# Altium PCB M238封装 AD版本.PcbDoc
Units mil, origin at the board's own origin, x right, y up, seen from the top; angles counter-clockwise.
Board outline 6000 x 4000 mil, 2 copper layers (Top Layer, Bottom Layer); 2 components, 0 nets, 758 pads, 0 vias.
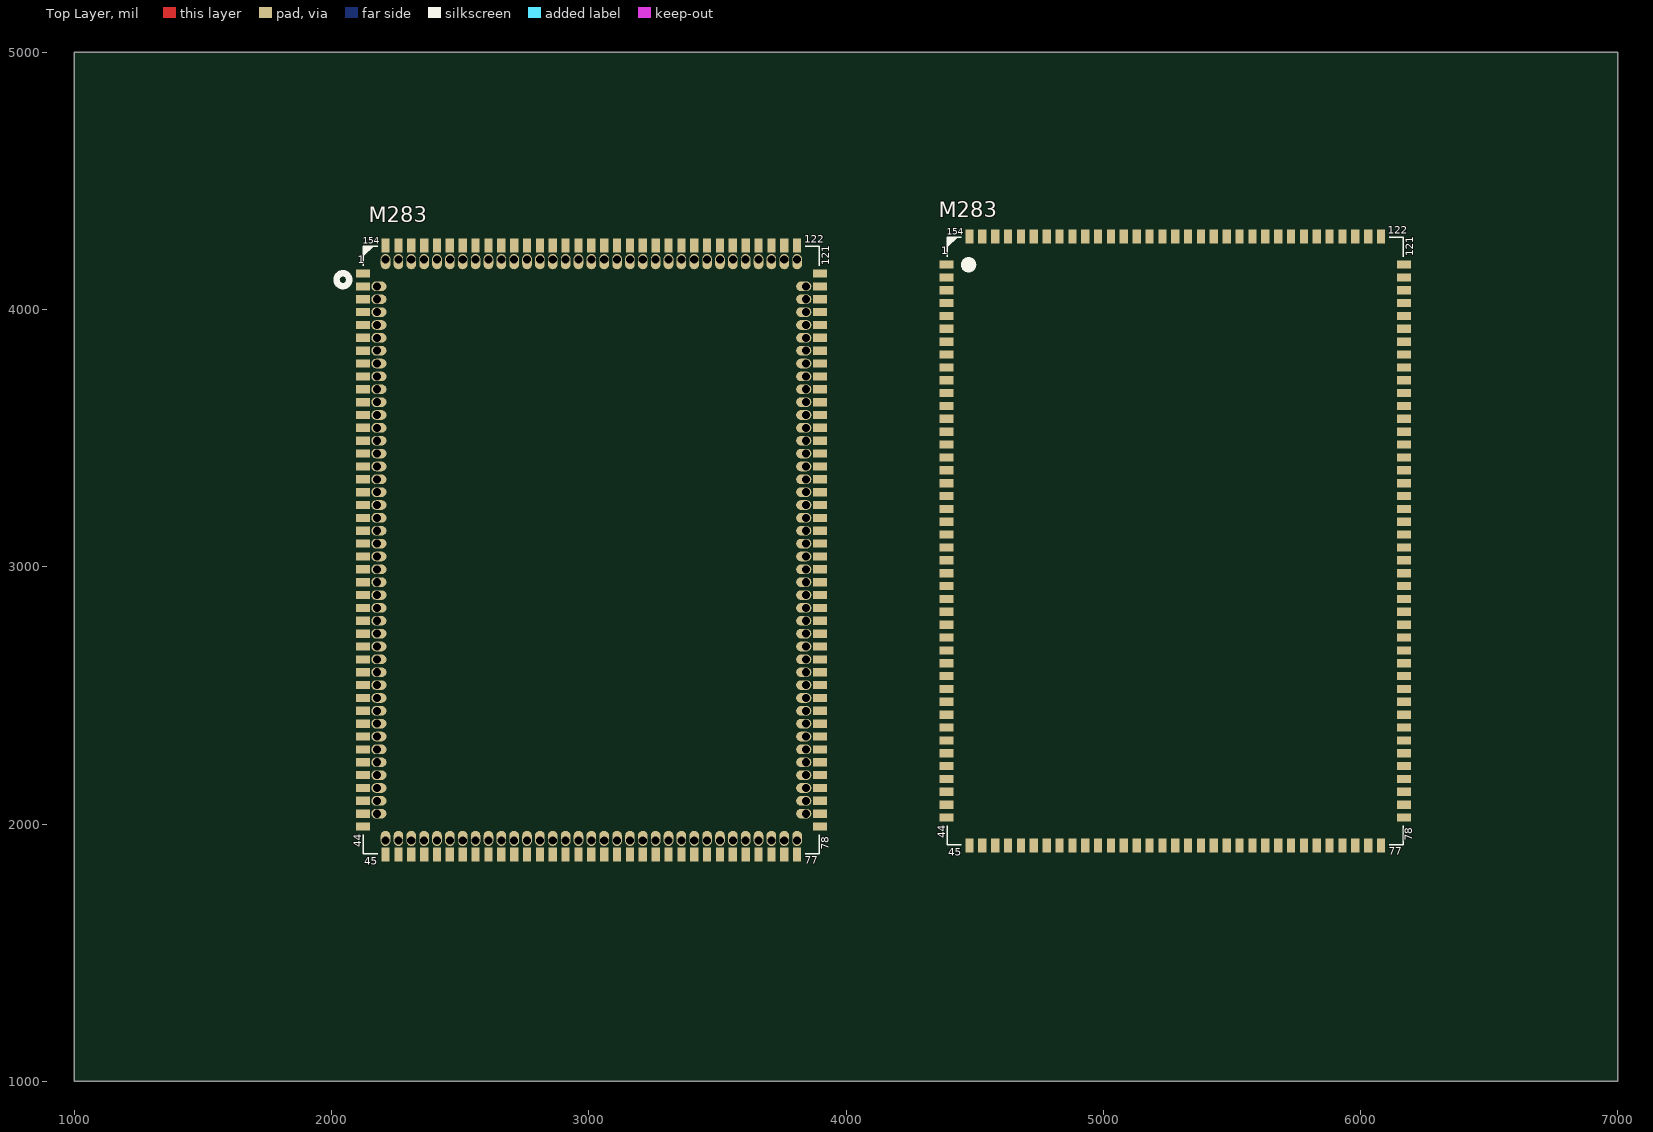
[diagram p0: Top Layer view]
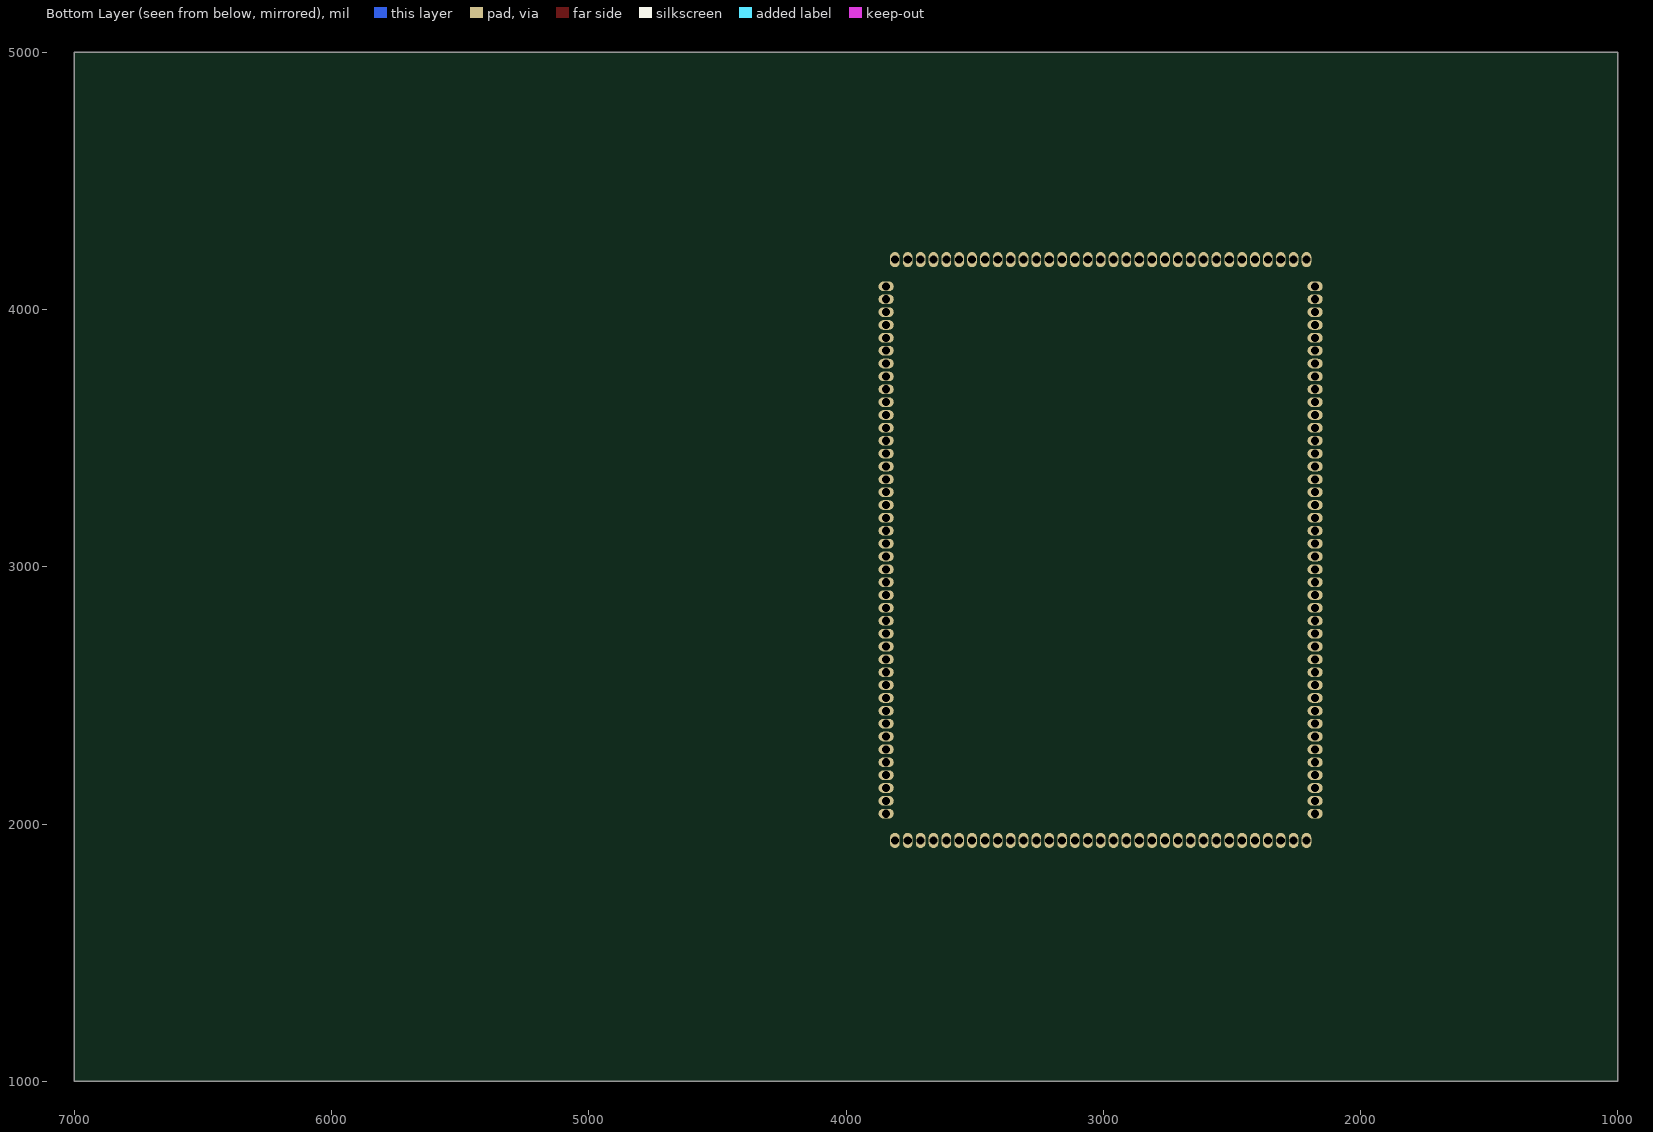
[diagram p1: Bottom Layer view, seen from below]

## Layer stack, top to bottom
Top Layer: signal copper 1.4
Dielectric: dielectric 12.6, FR-4, Dk 4.8
Bottom Layer: signal copper 1.4

## Board outline
1000,1000 7000,1000 7000,5000 1000,5000

## Design rules (kind name [scope] priority, off if disabled: settings)
Clearance [All] p1: gap=10
PolygonConnect [All] p1: connectstyle=Relief reliefconductorwidth=10 reliefentries=4 polygonreliefangle="90 Angle"
RoutingVias [All] p1: holewidth=28 width=50 viastyle="Through Hole" minholewidth=28 minwidth=50 maxholewidth=28 maxwidth=50
SilkscreenOverComponentPads [All] p1: minsilkscreentomaskgap=10
SolderMaskExpansion [All] p1: expansion=4
Width [All] p1: maxlimit=10 minlimit=10 preferedwidth=10
27 further rules are at their usual default settings.

## Components (designator, comment, footprint, x,y, rotation, side; value= is the part's Value field where it differs from the comment)
M283 "Comment" M283-154-NC 5280,3100 r0 top
M283 "Comment" M283-154 3010,3065 r0 top

## Footprints (in the part's own frame and the unit in brackets; to place one, negate y for a bottom-side part, rotate by r counter-clockwise, add the part's x,y. Pads: shape width x height; smd on the part's side, far side on the other; paste and mask are expansions set on the pad)
M283-154 [mm]
  rect 1.384x0.813 smd mask+0.051: 1(-22.57,27.305) 2(-22.57,26.035) 3(-22.57,24.765) 4(-22.57,23.495) 5(-22.57,22.225) 6(-22.57,20.955) 7(-22.57,19.685) 8(-22.57,18.415) 9(-22.57,17.145) 10(-22.57,15.875) 11(-22.57,14.605) 12(-22.57,13.335) 13(-22.57,12.065) 14(-22.57,10.795) 15(-22.57,9.525) 16(-22.57,8.255) 17(-22.57,6.985) 18(-22.57,5.715) 19(-22.57,4.445) 20(-22.57,3.175) 21(-22.57,1.905) 22(-22.57,0.635) 23(-22.57,-0.635) 24(-22.57,-1.905) 25(-22.57,-3.175) 26(-22.57,-4.445) 27(-22.57,-5.715) 28(-22.57,-6.985) 29(-22.57,-8.255) 30(-22.57,-9.525) 31(-22.57,-10.795) 32(-22.57,-12.065) 33(-22.57,-13.335) 34(-22.57,-14.605) 35(-22.57,-15.875) 36(-22.57,-17.145) 37(-22.57,-18.415) 38(-22.57,-19.685) 39(-22.57,-20.955) 40(-22.57,-22.225) 41(-22.57,-23.495) 42(-22.57,-24.765) 43(-22.57,-26.035) 44(-22.57,-27.305) 78(22.57,-27.305) 79(22.57,-26.035) 80(22.57,-24.765) 81(22.57,-23.495) 82(22.57,-22.225) 83(22.57,-20.955) 84(22.57,-19.685) 85(22.57,-18.415) 86(22.57,-17.145) 87(22.57,-15.875) 88(22.57,-14.605) 89(22.57,-13.335) 90(22.57,-12.065) 91(22.57,-10.795) 92(22.57,-9.525) 93(22.57,-8.255) 94(22.57,-6.985) 95(22.57,-5.715) 96(22.57,-4.445) 97(22.57,-3.175) 98(22.57,-1.905) 99(22.57,-0.635) 100(22.57,0.635) 101(22.57,1.905) 102(22.57,3.175) 103(22.57,4.445) 104(22.57,5.715) 105(22.57,6.985) 106(22.57,8.255) 107(22.57,9.525) 108(22.57,10.795) 109(22.57,12.065) 110(22.57,13.335) 111(22.57,14.605) 112(22.57,15.875) 113(22.57,17.145) 114(22.57,18.415) 115(22.57,19.685) 116(22.57,20.955) 117(22.57,22.225) 118(22.57,23.495) 119(22.57,24.765) 120(22.57,26.035) 121(22.57,27.305)
  oval 1x0.94 hole 0.8 mask+0.051: 2(-21.179,26.035) 3(-21.179,24.765) 4(-21.179,23.495) 5(-21.179,22.225) 6(-21.179,20.955) 7(-21.179,19.685) 8(-21.179,18.415) 9(-21.179,17.145) 10(-21.179,15.875) 11(-21.179,14.605) 12(-21.179,13.335) 13(-21.179,12.065) 14(-21.179,10.795) 15(-21.179,9.525) 16(-21.179,8.255) 17(-21.179,6.985) 18(-21.179,5.715) 19(-21.179,4.445) 20(-21.179,3.175) 21(-21.179,1.905) 22(-21.179,0.635) 23(-21.179,-0.635) 24(-21.179,-1.905) 25(-21.179,-3.175) 26(-21.179,-4.445) 27(-21.179,-5.715) 28(-21.179,-6.985) 29(-21.179,-8.255) 30(-21.179,-9.525) 31(-21.179,-10.795) 32(-21.179,-12.065) 33(-21.179,-13.335) 34(-21.179,-14.605) 35(-21.179,-15.875) 36(-21.179,-17.145) 37(-21.179,-18.415) 38(-21.179,-19.685) 39(-21.179,-20.955) 40(-21.179,-22.225) 41(-21.179,-23.495) 42(-21.179,-24.765) 43(-21.179,-26.035) 79(21.179,-26.035) 80(21.179,-24.765) 81(21.179,-23.495) 82(21.179,-22.225) 83(21.179,-20.955) 84(21.179,-19.685) 85(21.179,-18.415) 86(21.179,-17.145) 87(21.179,-15.875) 88(21.179,-14.605) 89(21.179,-13.335) 90(21.179,-12.065) 91(21.179,-10.795) 92(21.179,-9.525) 93(21.179,-8.255) 94(21.179,-6.985) 95(21.179,-5.715) 96(21.179,-4.445) 97(21.179,-3.175) 98(21.179,-1.905) 99(21.179,-0.635) 100(21.179,0.635) 101(21.179,1.905) 102(21.179,3.175) 103(21.179,4.445) 104(21.179,5.715) 105(21.179,6.985) 106(21.179,8.255) 107(21.179,9.525) 108(21.179,10.795) 109(21.179,12.065) 110(21.179,13.335) 111(21.179,14.605) 112(21.179,15.875) 113(21.179,17.145) 114(21.179,18.415) 115(21.179,19.685) 116(21.179,20.955) 117(21.179,22.225) 118(21.179,23.495) 119(21.179,24.765) 120(21.179,26.035)
  oval 1.5x0.95 smd far side paste-14 mask+0.051: 2(-21.179,26.035) 3(-21.179,24.765) 4(-21.179,23.495) 5(-21.179,22.225) 6(-21.179,20.955) 7(-21.179,19.685) 8(-21.179,18.415) 9(-21.179,17.145) 10(-21.179,15.875) 11(-21.179,14.605) 12(-21.179,13.335) 13(-21.179,12.065) 14(-21.179,10.795) 15(-21.179,9.525) 16(-21.179,8.255) 17(-21.179,6.985) 18(-21.179,5.715) 19(-21.179,4.445) 20(-21.179,3.175) 21(-21.179,1.905) 22(-21.179,0.635) 23(-21.179,-0.635) 24(-21.179,-1.905) 25(-21.179,-3.175) 26(-21.179,-4.445) 27(-21.179,-5.715) 28(-21.179,-6.985) 29(-21.179,-8.255) 30(-21.179,-9.525) 31(-21.179,-10.795) 32(-21.179,-12.065) 33(-21.179,-13.335) 34(-21.179,-14.605) 35(-21.179,-15.875) 36(-21.179,-17.145) 37(-21.179,-18.415) 38(-21.179,-19.685) 39(-21.179,-20.955) 40(-21.179,-22.225) 41(-21.179,-23.495) 42(-21.179,-24.765) 43(-21.179,-26.035) 79(21.179,-26.035) 80(21.179,-24.765) 81(21.179,-23.495) 82(21.179,-22.225) 83(21.179,-20.955) 84(21.179,-19.685) 85(21.179,-18.415) 86(21.179,-17.145) 87(21.179,-15.875) 88(21.179,-14.605) 89(21.179,-13.335) 90(21.179,-12.065) 91(21.179,-10.795) 92(21.179,-9.525) 93(21.179,-8.255) 94(21.179,-6.985) 95(21.179,-5.715) 96(21.179,-4.445) 97(21.179,-3.175) 98(21.179,-1.905) 99(21.179,-0.635) 100(21.179,0.635) 101(21.179,1.905) 102(21.179,3.175) 103(21.179,4.445) 104(21.179,5.715) 105(21.179,6.985) 106(21.179,8.255) 107(21.179,9.525) 108(21.179,10.795) 109(21.179,12.065) 110(21.179,13.335) 111(21.179,14.605) 112(21.179,15.875) 113(21.179,17.145) 114(21.179,18.415) 115(21.179,19.685) 116(21.179,20.955) 117(21.179,22.225) 118(21.179,23.495) 119(21.179,24.765) 120(21.179,26.035)
  oval 1.5x0.95 smd paste-14: 2(-20.976,26.035)
  oval 1.5x0.95 smd paste-14 mask+0.102: 3(-20.976,24.765) 4(-20.976,23.495) 5(-20.976,22.225) 6(-20.976,20.955) 7(-20.976,19.685) 8(-20.976,18.415) 9(-20.976,17.145) 10(-20.976,15.875) 11(-20.976,14.605) 12(-20.976,13.335) 13(-20.976,12.065) 14(-20.976,10.795) 15(-20.976,9.525) 16(-20.976,8.255) 17(-20.976,6.985) 18(-20.976,5.715) 19(-20.976,4.445) 20(-20.976,3.175) 21(-20.976,1.905) 22(-20.976,0.635) 23(-20.976,-0.635) 24(-20.976,-1.905) 25(-20.976,-3.175) 26(-20.976,-4.445) 27(-20.976,-5.715) 28(-20.976,-6.985) 29(-20.976,-8.255) 30(-20.976,-9.525) 31(-20.976,-10.795) 32(-20.976,-12.065) 33(-20.976,-13.335) 34(-20.976,-14.605) 35(-20.976,-15.875) 36(-20.976,-17.145) 37(-20.976,-18.415) 38(-20.976,-19.685) 39(-20.976,-20.955) 40(-20.976,-22.225) 41(-20.976,-23.495) 42(-20.976,-24.765) 43(-20.976,-26.035) 79(20.976,-26.035) 80(20.976,-24.765) 81(20.976,-23.495) 82(20.976,-22.225) 83(20.976,-20.955) 84(20.976,-19.685) 85(20.976,-18.415) 86(20.976,-17.145) 87(20.976,-15.875) 88(20.976,-14.605) 89(20.976,-13.335) 90(20.976,-12.065) 91(20.976,-10.795) 92(20.976,-9.525) 93(20.976,-8.255) 94(20.976,-6.985) 95(20.976,-5.715) 96(20.976,-4.445) 97(20.976,-3.175) 98(20.976,-1.905) 99(20.976,-0.635) 100(20.976,0.635) 101(20.976,1.905) 102(20.976,3.175) 103(20.976,4.445) 104(20.976,5.715) 105(20.976,6.985) 106(20.976,8.255) 107(20.976,9.525) 108(20.976,10.795) 109(20.976,12.065) 110(20.976,13.335) 111(20.976,14.605) 112(20.976,15.875) 113(20.976,17.145) 114(20.976,18.415) 115(20.976,19.685) 116(20.976,20.955) 117(20.976,22.225) 118(20.976,23.495) 119(20.976,24.765) 120(20.976,26.035)
  rect 0.813x1.384 smd mask+0.051: 45(-20.32,-30.07) 46(-19.05,-30.07) 47(-17.78,-30.07) 48(-16.51,-30.07) 49(-15.24,-30.07) 50(-13.97,-30.07) 51(-12.7,-30.07) 52(-11.43,-30.07) 53(-10.16,-30.07) 54(-8.89,-30.07) 55(-7.62,-30.07) 56(-6.35,-30.07) 57(-5.08,-30.07) 58(-3.81,-30.07) 59(-2.54,-30.07) 60(-1.27,-30.07) 61(0,-30.07) 62(1.27,-30.07) 63(2.54,-30.07) 64(3.81,-30.07) 65(5.08,-30.07) 66(6.35,-30.07) 67(7.62,-30.07) 68(8.89,-30.07) 69(10.16,-30.07) 70(11.43,-30.07) 71(12.7,-30.07) 72(13.97,-30.07) 73(15.24,-30.07) 74(16.51,-30.07) 75(17.78,-30.07) 76(19.05,-30.07) 77(20.32,-30.07) 122(20.32,30.07) 123(19.05,30.07) 124(17.78,30.07) 125(16.51,30.07) 126(15.24,30.07) 127(13.97,30.07) 128(12.7,30.07) 129(11.43,30.07) 130(10.16,30.07) 131(8.89,30.07) 132(7.62,30.07) 133(6.35,30.07) 134(5.08,30.07) 135(3.81,30.07) 136(2.54,30.07) 137(1.27,30.07) 138(0,30.07) 139(-1.27,30.07) 140(-2.54,30.07) 141(-3.81,30.07) 142(-5.08,30.07) 143(-6.35,30.07) 144(-7.62,30.07) 145(-8.89,30.07) 146(-10.16,30.07) 147(-11.43,30.07) 148(-12.7,30.07) 149(-13.97,30.07) 150(-15.24,30.07) 151(-16.51,30.07) 152(-17.78,30.07) 153(-19.05,30.07) 154(-20.32,30.07)
  oval 0.95x1 hole 0.8 mask+0.051: 45(-20.32,-28.679)
  oval 0.95x1.5 smd far side paste-14 mask+0.051: 45(-20.32,-28.679) 46(-19.05,-28.679) 47(-17.78,-28.679) 48(-16.51,-28.679) 49(-15.24,-28.679) 50(-13.97,-28.679) 51(-12.7,-28.679) 52(-11.43,-28.679) 53(-10.16,-28.679) 54(-8.89,-28.679) 55(-7.62,-28.679) 56(-6.35,-28.679) 57(-5.08,-28.679) 58(-3.81,-28.679) 59(-2.54,-28.679) 60(-1.27,-28.679) 61(0,-28.679) 62(1.27,-28.679) 63(2.54,-28.679) 64(3.81,-28.679) 65(5.08,-28.679) 66(6.35,-28.679) 67(7.62,-28.679) 68(8.89,-28.679) 69(10.16,-28.679) 70(11.43,-28.679) 71(12.7,-28.679) 72(13.97,-28.679) 73(15.24,-28.679) 74(16.51,-28.679) 75(17.78,-28.679) 76(19.05,-28.679) 77(20.32,-28.679) 122(20.32,28.679) 123(19.05,28.679) 124(17.78,28.679) 125(16.51,28.679) 126(15.24,28.679) 127(13.97,28.679) 128(12.7,28.679) 129(11.43,28.679) 130(10.16,28.679) 131(8.89,28.679) 132(7.62,28.679) 133(6.35,28.679) 134(5.08,28.679) 135(3.81,28.679) 136(2.54,28.679) 137(1.27,28.679) 138(0,28.679) 139(-1.27,28.679) 140(-2.54,28.679) 141(-3.81,28.679) 142(-5.08,28.679) 143(-6.35,28.679) 144(-7.62,28.679) 145(-8.89,28.679) 146(-10.16,28.679) 147(-11.43,28.679) 148(-12.7,28.679) 149(-13.97,28.679) 150(-15.24,28.679) 151(-16.51,28.679) 152(-17.78,28.679) 153(-19.05,28.679) 154(-20.32,28.679)
  oval 0.95x1.5 smd paste-14 mask+0.102: 45(-20.32,-28.476) 46(-19.05,-28.476) 47(-17.78,-28.476) 48(-16.51,-28.476) 49(-15.24,-28.476) 50(-13.97,-28.476) 51(-12.7,-28.476) 52(-11.43,-28.476) 53(-10.16,-28.476) 54(-8.89,-28.476) 55(-7.62,-28.476) 56(-6.35,-28.476) 57(-5.08,-28.476) 58(-3.81,-28.476) 59(-2.54,-28.476) 60(-1.27,-28.476) 61(0,-28.476) 62(1.27,-28.476) 63(2.54,-28.476) 64(3.81,-28.476) 65(5.08,-28.476) 66(6.35,-28.476) 67(7.62,-28.476) 68(8.89,-28.476) 69(10.16,-28.476) 70(11.43,-28.476) 71(12.7,-28.476) 72(13.97,-28.476) 73(15.24,-28.476) 74(16.51,-28.476) 75(17.78,-28.476) 76(19.05,-28.476) 77(20.32,-28.476) 122(20.32,28.476) 123(19.05,28.476) 124(17.78,28.476) 125(16.51,28.476) 126(15.24,28.476) 127(13.97,28.476) 128(12.7,28.476) 129(11.43,28.476) 130(10.16,28.476) 131(8.89,28.476) 132(7.62,28.476) 133(6.35,28.476) 134(5.08,28.476) 135(3.81,28.476) 136(2.54,28.476) 137(1.27,28.476) 138(0,28.476) 139(-1.27,28.476) 140(-2.54,28.476) 141(-3.81,28.476) 142(-5.08,28.476) 143(-6.35,28.476) 144(-7.62,28.476) 145(-8.89,28.476) 146(-10.16,28.476) 147(-11.43,28.476) 148(-12.7,28.476) 149(-13.97,28.476) 150(-15.24,28.476) 151(-16.51,28.476) 152(-17.78,28.476) 153(-19.05,28.476) 154(-20.32,28.476)
  oval 0.94x1 hole 0.8 mask+0.051: 46(-19.05,-28.679) 47(-17.78,-28.679) 48(-16.51,-28.679) 49(-15.24,-28.679) 50(-13.97,-28.679) 51(-12.7,-28.679) 52(-11.43,-28.679) 53(-10.16,-28.679) 54(-8.89,-28.679) 55(-7.62,-28.679) 56(-6.35,-28.679) 57(-5.08,-28.679) 58(-3.81,-28.679) 59(-2.54,-28.679) 60(-1.27,-28.679) 61(0,-28.679) 62(1.27,-28.679) 63(2.54,-28.679) 64(3.81,-28.679) 65(5.08,-28.679) 66(6.35,-28.679) 67(7.62,-28.679) 68(8.89,-28.679) 69(10.16,-28.679) 70(11.43,-28.679) 71(12.7,-28.679) 72(13.97,-28.679) 73(15.24,-28.679) 74(16.51,-28.679) 75(17.78,-28.679) 76(19.05,-28.679) 77(20.32,-28.679) 122(20.32,28.679) 123(19.05,28.679) 124(17.78,28.679) 125(16.51,28.679) 126(15.24,28.679) 127(13.97,28.679) 128(12.7,28.679) 129(11.43,28.679) 130(10.16,28.679) 131(8.89,28.679) 132(7.62,28.679) 133(6.35,28.679) 134(5.08,28.679) 135(3.81,28.679) 136(2.54,28.679) 137(1.27,28.679) 138(0,28.679) 139(-1.27,28.679) 140(-2.54,28.679) 141(-3.81,28.679) 142(-5.08,28.679) 143(-6.35,28.679) 144(-7.62,28.679) 145(-8.89,28.679) 146(-10.16,28.679) 147(-11.43,28.679) 148(-12.7,28.679) 149(-13.97,28.679) 150(-15.24,28.679) 151(-16.51,28.679) 152(-17.78,28.679) 153(-19.05,28.679) 154(-20.32,28.679)
  silkscreen extent -25.16,-30 22.5,30
M283-154-NC [mil]
  rect 54.5x32 smd mask+2: 1(-888.58,1075) 2(-888.58,1025) 3(-888.58,975) 4(-888.58,925) 5(-888.58,875) 6(-888.58,825) 7(-888.58,775) 8(-888.58,725) 9(-888.58,675) 10(-888.58,625) 11(-888.58,575) 12(-888.58,525) 13(-888.58,475) 14(-888.58,425) 15(-888.58,375) 16(-888.58,325) 17(-888.58,275) 18(-888.58,225) 19(-888.58,175) 20(-888.58,125) 21(-888.58,75) 22(-888.58,25) 23(-888.58,-25) 24(-888.58,-75) 25(-888.58,-125) 26(-888.58,-175) 27(-888.58,-225) 28(-888.58,-275) 29(-888.58,-325) 30(-888.58,-375) 31(-888.58,-425) 32(-888.58,-475) 33(-888.58,-525) 34(-888.58,-575) 35(-888.58,-625) 36(-888.58,-675) 37(-888.58,-725) 38(-888.58,-775) 39(-888.58,-825) 40(-888.58,-875) 41(-888.58,-925) 42(-888.58,-975) 43(-888.58,-1025) 44(-888.58,-1075) 78(888.58,-1075) 79(888.58,-1025) 80(888.58,-975) 81(888.58,-925) 82(888.58,-875) 83(888.58,-825) 84(888.58,-775) 85(888.58,-725) 86(888.58,-675) 87(888.58,-625) 88(888.58,-575) 89(888.58,-525) 90(888.58,-475) 91(888.58,-425) 92(888.58,-375) 93(888.58,-325) 94(888.58,-275) 95(888.58,-225) 96(888.58,-175) 97(888.58,-125) 98(888.58,-75) 99(888.58,-25) 100(888.58,25) 101(888.58,75) 102(888.58,125) 103(888.58,175) 104(888.58,225) 105(888.58,275) 106(888.58,325) 107(888.58,375) 108(888.58,425) 109(888.58,475) 110(888.58,525) 111(888.58,575) 112(888.58,625) 113(888.58,675) 114(888.58,725) 115(888.58,775) 116(888.58,825) 117(888.58,875) 118(888.58,925) 119(888.58,975) 120(888.58,1025) 121(888.58,1075)
  rect 32x54.5 smd mask+2: 45(-800,-1183.85) 46(-750,-1183.85) 47(-700,-1183.85) 48(-650,-1183.85) 49(-600,-1183.85) 50(-550,-1183.85) 51(-500,-1183.85) 52(-450,-1183.85) 53(-400,-1183.85) 54(-350,-1183.85) 55(-300,-1183.85) 56(-250,-1183.85) 57(-200,-1183.85) 58(-150,-1183.85) 59(-100,-1183.85) 60(-50,-1183.85) 61(0,-1183.85) 62(50,-1183.85) 63(100,-1183.85) 64(150,-1183.85) 65(200,-1183.85) 66(250,-1183.85) 67(300,-1183.85) 68(350,-1183.85) 69(400,-1183.85) 70(450,-1183.85) 71(500,-1183.85) 72(550,-1183.85) 73(600,-1183.85) 74(650,-1183.85) 75(700,-1183.85) 76(750,-1183.85) 77(800,-1183.85) 122(800,1183.85) 123(750,1183.85) 124(700,1183.85) 125(650,1183.85) 126(600,1183.85) 127(550,1183.85) 128(500,1183.85) 129(450,1183.85) 130(400,1183.85) 131(350,1183.85) 132(300,1183.85) 133(250,1183.85) 134(200,1183.85) 135(150,1183.85) 136(100,1183.85) 137(50,1183.85) 138(0,1183.85) 139(-50,1183.85) 140(-100,1183.85) 141(-150,1183.85) 142(-200,1183.85) 143(-250,1183.85) 144(-300,1183.85) 145(-350,1183.85) 146(-400,1183.85) 147(-450,1183.85) 148(-500,1183.85) 149(-550,1183.85) 150(-600,1183.85) 151(-650,1183.85) 152(-700,1183.85) 153(-750,1183.85) 154(-800,1183.85)
  silkscreen extent -886,-1181 886,1181

## Nets (pads, with @x,y where several pads share a name; then routed paths per layer and width w, separated by ;. In a path a pad name is that pad's centre, name@x,y a point inside that pad or via, vN(x,y) a via of type N, cw(c..) or ccw(c..) an arc to the next point about the centre after c; other vN are vias at no path point)
pads on no net: M283.1 M283.2 M283.3 M283.4 M283.5 M283.6 M283.7 M283.8 M283.9 M283.10 M283.11 M283.12 M283.13 M283.14 M283.15 M283.16 M283.17 M283.18 M283.19 M283.20 M283.21 M283.22 M283.23 M283.24 M283.25 M283.26 M283.27 M283.28 M283.29 M283.30 M283.31 M283.32 M283.33 M283.34 M283.35 M283.36 M283.37 M283.38 M283.39 M283.40 M283.41 M283.42 M283.43 M283.44 M283.45 M283.46 M283.47 M283.48 M283.49 M283.50 M283.51 M283.52 M283.53 M283.54 M283.55 M283.56 M283.57 M283.58 M283.59 M283.60 M283.61 M283.62 M283.63 M283.64 M283.65 M283.66 M283.67 M283.68 M283.69 M283.70 M283.71 M283.72 M283.73 M283.74 M283.75 M283.76 M283.77 M283.78 M283.79 M283.80 M283.81 M283.82 M283.83 M283.84 M283.85 M283.86 M283.87 M283.88 M283.89 M283.90 M283.91 M283.92 M283.93 M283.94 M283.95 M283.96 M283.97 M283.98 M283.99 M283.100 M283.101 M283.102 M283.103 M283.104 M283.105 M283.106 M283.107 M283.108 M283.109 M283.110 M283.111 M283.112 M283.113 M283.114 M283.115 M283.116 M283.117 M283.118 M283.119 M283.120 M283.121 M283.122 M283.123 M283.124 M283.125 M283.126 M283.127 M283.128 M283.129 M283.130 M283.131 M283.132 M283.133 M283.134 M283.135 M283.136 M283.137 M283.138 M283.139 M283.140 M283.141 M283.142 M283.143 M283.144 M283.145 M283.146 M283.147 M283.148 M283.149 M283.150 M283.151 M283.152 M283.153 M283.154

## Text inside footprints (layer, text, board x,y; h text height)
M283: Top Overlay "44" at 2116,1910 h30 r90; Top Overlay "45" at 2127,1842 h30; Top Overlay "77" at 3840,1845 h30; Top Overlay "78" at 3932,1899 h30 r90; Top Overlay "121" at 3935,4172 h30 r90; Top Overlay "122" at 3837,4259 h30; Top Overlay "1" at 2101,4180 h30; Top Overlay "154" at 2121,4256 h25
M283: Top Overlay "154" at 4391,4291 h25; Top Overlay "1" at 4371,4215 h30; Top Overlay "122" at 6107,4294 h30; Top Overlay "121" at 6205,4207 h30 r90; Top Overlay "78" at 6202,1934 h30 r90; Top Overlay "77" at 6110,1880 h30; Top Overlay "45" at 4397,1877 h30; Top Overlay "44" at 4386,1945 h30 r90; Mechanical 1 "此处挖空" at 5175,3082 h60